# Altium PCB Maix-II.PcbDoc
Units mil, origin at the board's own origin, x right, y up, seen from the top; angles counter-clockwise.
Board outline 6000 x 4000 mil, 2 copper layers (Top Layer, Bottom Layer); 2 components, 0 nets, 72 pads, 0 vias.
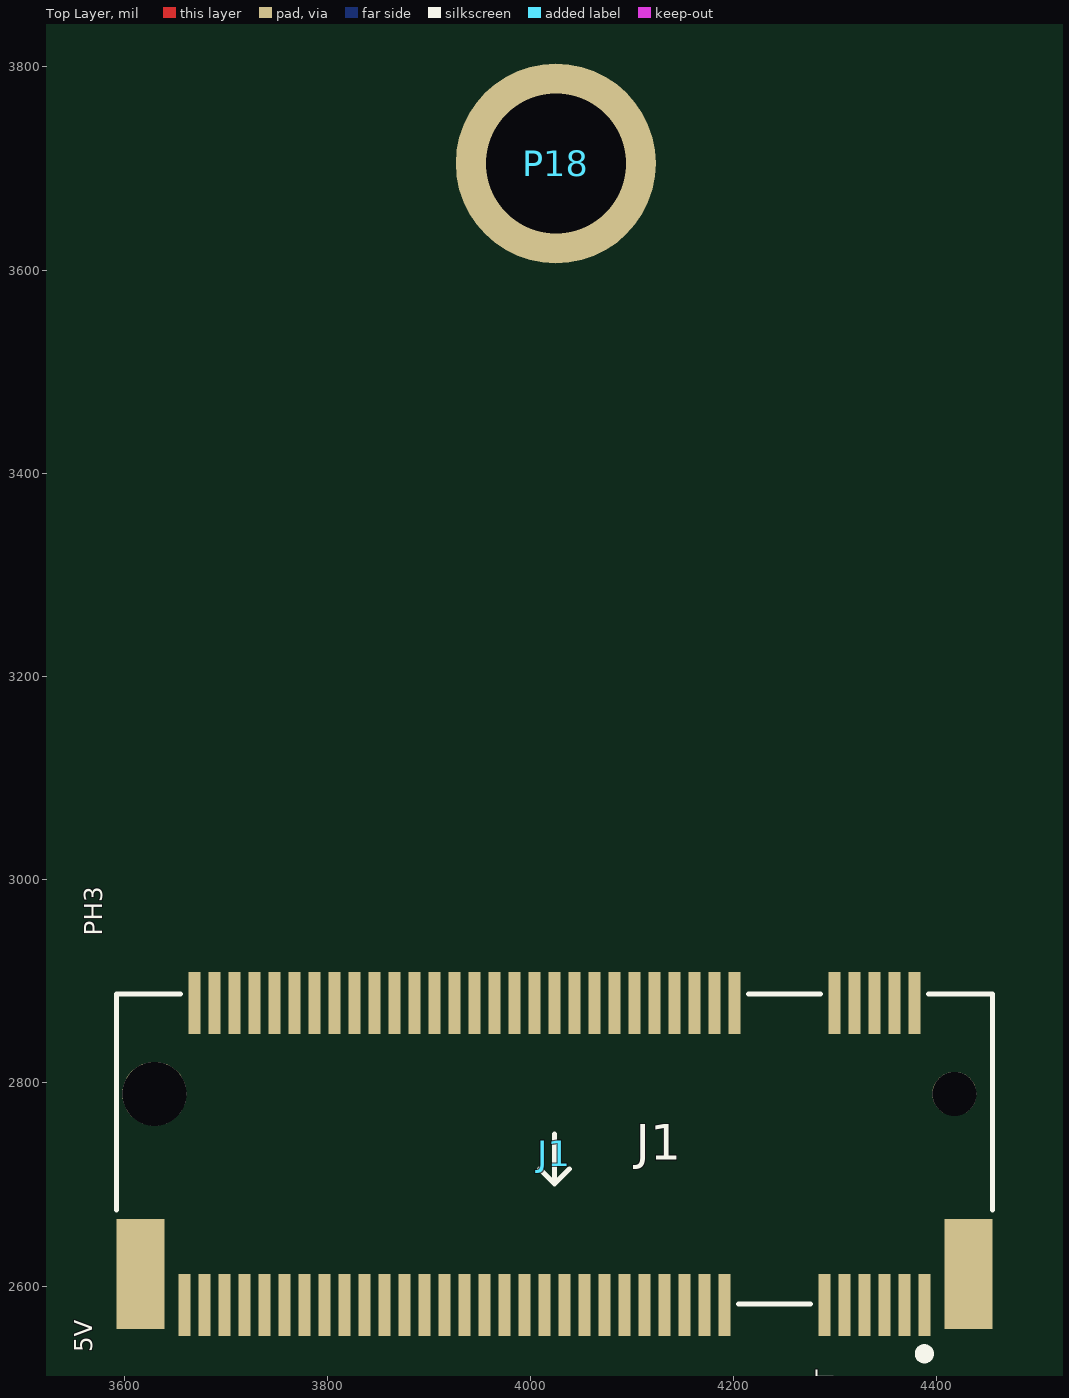
[diagram p0: Top Layer view]
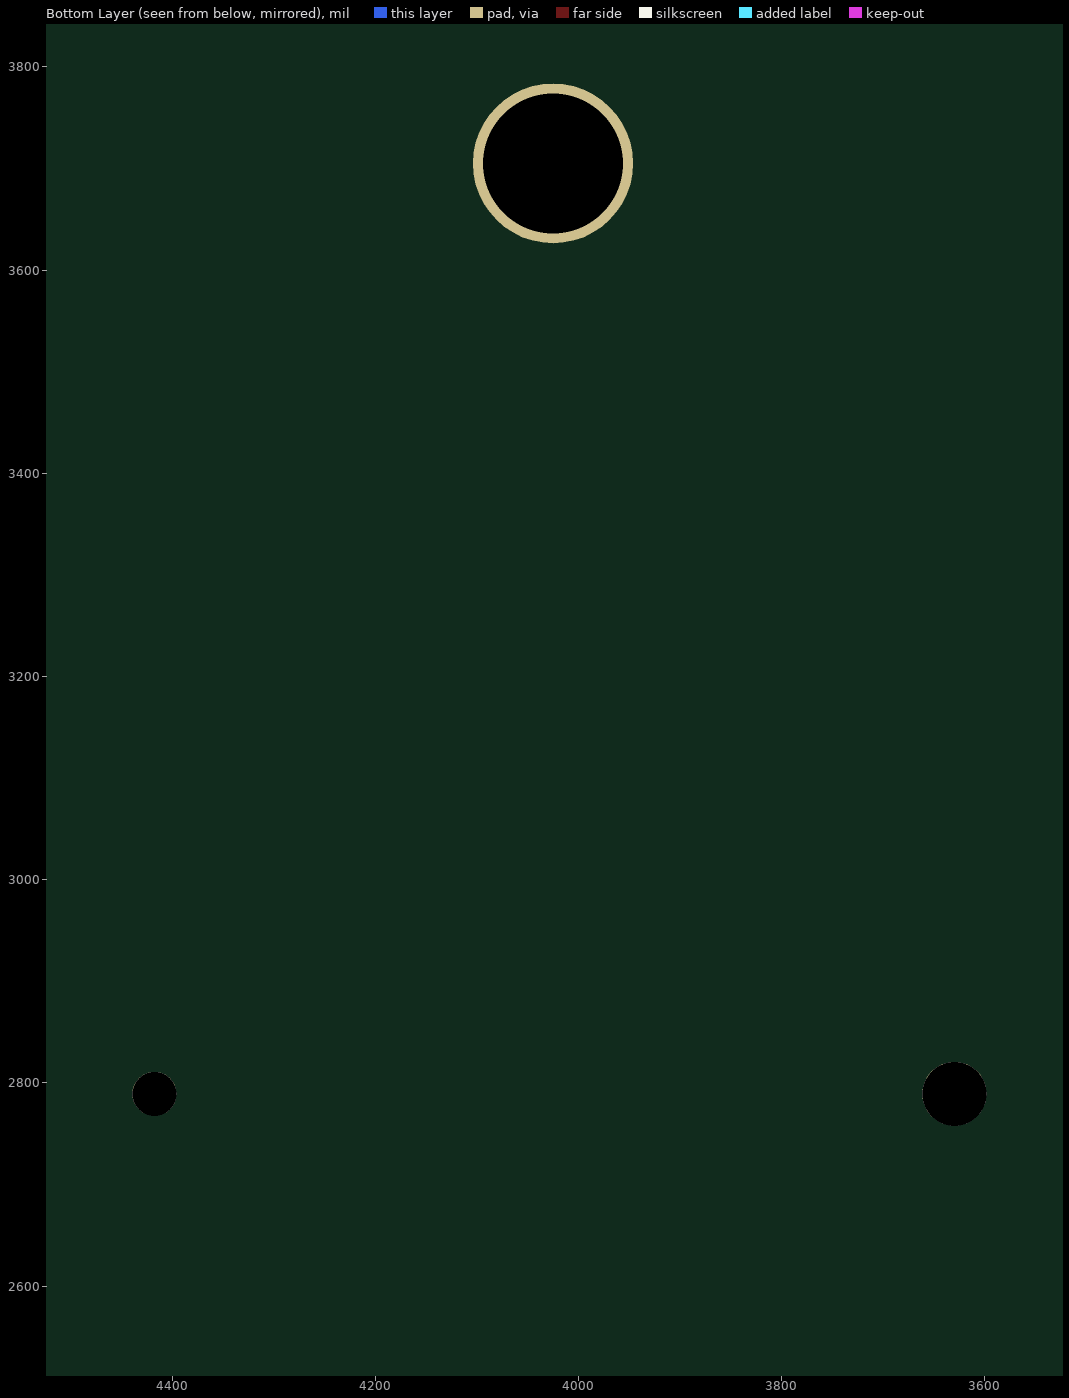
[diagram p1: Bottom Layer view, seen from below]

## Layer stack, top to bottom
Top Solder: solder mask 0.4, Solder Resist, Dk 3.5
Top Layer: signal copper 1.4
Dielectric 1: dielectric 12.6, FR-4, Dk 4.8
Bottom Layer: signal copper 1.4
Bottom Solder: solder mask 0.4, Solder Resist, Dk 3.5

## Board outline
1000,1000 7000,1000 7000,5000 1000,5000

## Design rules (kind name [scope] priority, off if disabled: settings)
Clearance [All] p1: gap=10 ignorepadtopadclearanceinfootprint=FALSE except(0: Arc-Hole Track-Hole SMDPad-Hole THPad-Hole Via-Hole Fill-Hole Poly-Hole Region-Hole Text-Hole)
PolygonConnect [All] p1: connectstyle=Relief reliefconductorwidth=10 reliefentries=4 polygonreliefangle="90 Angle" airgapwidth=10
RoutingVias [All] p1: holewidth=28 width=50 viastyle="Through Hole" minholewidth=28 minwidth=50 maxholewidth=28 maxwidth=50
SolderMaskExpansion [All] p1: expansion=4 istentingtop=FALSE
Width [All] p1: maxlimit=10 minlimit=10 preferedwidth=10
30 further rules are at their usual default settings.

## Components (designator, comment, footprint, x,y, rotation, side; value= is the part's Value field where it differs from the comment)
J1 "NGFF-67P_B-KEY座子 4.2H高" M2-67P0R50_B_FEMALE 4023.62,2789.26 r180 top
P18 "M2x4.5x4.2 铜柱2.6H 贴片螺母" "M.2 SMT-FEMALE - FULL" 4025,3705 r0 top

## Footprints (in the part's own frame and the unit in brackets; to place one, negate y for a bottom-side part, rotate by r counter-clockwise, add the part's x,y. Pads: shape width x height; smd on the part's side, far side on the other; paste and mask are expansions set on the pad)
M2-67P0R50_B_FEMALE [mm] "M2-67P0R50_B"
  rect 0.3x1.55 smd mask+0.051: 1(-9.25,5.275) 2(-9,-2.275) 3(-8.75,5.275) 4(-8.5,-2.275) 5(-8.25,5.275) 6(-8,-2.275) 7(-7.75,5.275) 8(-7.5,-2.275) 9(-7.25,5.275) 10(-7,-2.275) 11(-6.75,5.275) 20(-4.5,-2.275) 21(-4.25,5.275) 22(-4,-2.275) 23(-3.75,5.275) 24(-3.5,-2.275) 25(-3.25,5.275) 26(-3,-2.275) 27(-2.75,5.275) 28(-2.5,-2.275) 29(-2.25,5.275) 30(-2,-2.275) 31(-1.75,5.275) 32(-1.5,-2.275) 33(-1.25,5.275) 34(-1,-2.275) 35(-0.75,5.275) 36(-0.5,-2.275) 37(-0.25,5.275) 38(0,-2.275) 39(0.25,5.275) 40(0.5,-2.275) 41(0.75,5.275) 42(1,-2.275) 43(1.25,5.275) 44(1.5,-2.275) 45(1.75,5.275) 46(2,-2.275) 47(2.25,5.275) 48(2.5,-2.275) 49(2.75,5.275) 50(3,-2.275) 51(3.25,5.275) 52(3.5,-2.275) 53(3.75,5.275) 54(4,-2.275) 55(4.25,5.275) 56(4.5,-2.275) 57(4.75,5.275) 58(5,-2.275) 59(5.25,5.275) 60(5.5,-2.275) 61(5.75,5.275) 62(6,-2.275) 63(6.25,5.275) 64(6.5,-2.275) 65(6.75,5.275) 66(7,-2.275) 67(7.25,5.275) 68(7.5,-2.275) 69(7.75,5.275) 70(8,-2.275) 71(8.25,5.275) 72(8.5,-2.275) 73(8.75,5.275) 74(9,-2.275) 75(9.25,5.275)
  round 1.1 hole 1.1 mask+0.051: " "(-10,0)
  round 1.6 / inner round 1.524 / far side round 1.6 hole 1.6 mask+0.051: " "(10,0)
  rect 1.2x2.75 smd mask+0.051: SH1(-10.35,4.5) SH2(10.35,4.5)
  silkscreen extent -10.95,-2.5 10.95,6.62, body extent -10.95,-2.85 10.95,5.85, height 4.09
"M.2 SMT-FEMALE - FULL" [mm]
  round 5 / inner round 4 / far side round 4 hole 3.5 paste+0 mask+0.051: 1(0,0)
  body extent -2.26,-2.24 2.24,2.26, height 2.46

## Part data
J1: library part NGFF-67P_B-MALE
P18: library part HEADER-1X1

## Nets (pads, with @x,y where several pads share a name; then routed paths per layer and width w, separated by ;. In a path a pad name is that pad's centre, name@x,y a point inside that pad or via, vN(x,y) a via of type N, cw(c..) or ccw(c..) an arc to the next point about the centre after c; other vN are vias at no path point)
pads on no net: "J1. " J1.1 J1.2 J1.3 J1.4 J1.5 J1.6 J1.7 J1.8 J1.9 J1.10 J1.11 J1.20 J1.21 J1.22 J1.23 J1.24 J1.25 J1.26 J1.27 J1.28 J1.29 J1.30 J1.31 J1.32 J1.33 J1.34 J1.35 J1.36 J1.37 J1.38 J1.39 J1.40 J1.41 J1.42 J1.43 J1.44 J1.45 J1.46 J1.47 J1.48 J1.49 J1.50 J1.51 J1.52 J1.53 J1.54 J1.55 J1.56 J1.57 J1.58 J1.59 J1.60 J1.61 J1.62 J1.63 J1.64 J1.65 J1.66 J1.67 J1.68 J1.69 J1.70 J1.71 J1.72 J1.73 J1.74 J1.75 J1.SH1 J1.SH2 P18.1

## Silkscreen, mask and mechanical layers (free items; w line width, h text height)
Top Overlay:
  text "PH3" at 3584.67,2945 h30 r90
  text "5V" at 3574.67,2535 h30 r90
  text "AP-RESET" at 4304.67,2400 h30 r90

## Text inside footprints (layer, text, board x,y; h text height)
J1: Mechanical 9 "NGFF-67P_B" at 4062.99,2759.73 h20 r180; Mechanical 8 "38" at 3994.88,2846.82 h20 r180; Mechanical 8 "36" at 4014.57,2846.82 h20 r180; Mechanical 8 "28" at 4093.31,2846.82 h20 r180; Mechanical 8 "22" at 4152.36,2846.82 h20 r180; Mechanical 8 "20" at 4172.05,2846.82 h20 r180; Mechanical 8 "40" at 3975.2,2846.82 h20 r180; Mechanical 8 "21" at 4162.2,2549.58 h20 r180; Mechanical 8 "23" at 4142.52,2549.58 h20 r180; Mechanical 8 "25" at 4122.83,2549.58 h20 r180; Mechanical 8 "27" at 4103.15,2549.58 h20 r180; Mechanical 8 "44" at 3935.83,2846.82 h20 r180; Mechanical 8 "26" at 4112.99,2846.82 h20 r180; Mechanical 8 "24" at 4132.68,2846.82 h20 r180; Mechanical 8 "46" at 3916.14,2846.82 h20 r180; Mechanical 8 "74" at 3640.55,2846.82 h20 r180; Mechanical 8 "72" at 3660.24,2846.82 h20 r180; Mechanical 8 "34" at 4034.25,2846.82 h20 r180; Mechanical 8 "32" at 4053.94,2846.82 h20 r180; Mechanical 8 "75" at 3630.71,2549.58 h20 r180; Mechanical 8 "73" at 3650.39,2549.58 h20 r180; Mechanical 8 "4" at 4349.21,2862.82 h20 r180; Mechanical 8 "1" at 4378.74,2565.58 h20 r180; Mechanical 8 "3" at 4359.05,2565.58 h20 r180; Mechanical 8 "2" at 4368.9,2862.82 h20 r180; Mechanical 8 "69" at 3689.76,2549.58 h20 r180; Mechanical 8 "71" at 3670.08,2549.58 h20 r180; Mechanical 8 "56" at 3817.72,2846.82 h20 r180; Mechanical 8 "58" at 3798.03,2846.82 h20 r180; Mechanical 8 "70" at 3679.92,2846.82 h20 r180; Mechanical 8 "54" at 3837.4,2846.82 h20 r180; Mechanical 8 "48" at 3896.46,2846.82 h20 r180; Mechanical 8 "50" at 3876.77,2846.82 h20 r180; Mechanical 8 "62" at 3758.66,2846.82 h20 r180; Mechanical 8 "60" at 3778.35,2846.82 h20 r180; Mechanical 8 "66" at 3719.29,2846.82 h20 r180; Mechanical 8 "64" at 3738.98,2846.82 h20 r180; Mechanical 8 "52" at 3857.09,2846.82 h20 r180; Mechanical 8 "68" at 3699.61,2846.82 h20 r180; Mechanical 8 "53" at 3847.24,2549.58 h20 r180; Mechanical 8 "55" at 3827.56,2549.58 h20 r180; Mechanical 8 "59" at 3788.19,2549.58 h20 r180; Mechanical 8 "57" at 3807.87,2549.58 h20 r180; Mechanical 8 "63" at 3748.82,2549.58 h20 r180; Mechanical 8 "61" at 3768.5,2549.58 h20 r180; Mechanical 8 "65" at 3729.13,2549.58 h20 r180; Mechanical 8 "67" at 3709.45,2549.58 h20 r180; Mechanical 8 "41" at 3965.35,2549.58 h20 r180; Mechanical 8 "43" at 3945.67,2549.58 h20 r180; Mechanical 8 "45" at 3925.98,2549.58 h20 r180; Mechanical 8 "47" at 3906.3,2549.58 h20 r180; Mechanical 8 "29" at 4083.46,2549.58 h20 r180; Mechanical 8 "42" at 3955.51,2846.82 h20 r180; Mechanical 8 "35" at 4024.41,2549.58 h20 r180; Mechanical 8 "33" at 4044.09,2549.58 h20 r180; Mechanical 8 "49" at 3886.61,2549.58 h20 r180; Mechanical 8 "SH2" at 3587.4,2564.09 h20 r180; Mechanical 8 "5" at 4339.37,2565.58 h20 r180; Mechanical 8 "7" at 4319.68,2565.58 h20 r180; Mechanical 8 "8" at 4309.84,2862.82 h20 r180; Mechanical 8 "6" at 4329.53,2862.82 h20 r180; Mechanical 8 "SH1" at 4402.36,2564.09 h20 r180; Mechanical 8 "10" at 4290.16,2846.82 h20 r180; Mechanical 8 "30" at 4073.62,2846.82 h20 r180; Mechanical 8 "37" at 4004.72,2549.58 h20 r180; Mechanical 8 "39" at 3985.04,2549.58 h20 r180; Mechanical 8 "51" at 3866.93,2549.58 h20 r180; Mechanical 8 "31" at 4063.78,2549.58 h20 r180; Mechanical 8 "9" at 4300,2565.58 h20 r180; Mechanical 8 "11" at 4280.31,2549.58 h20 r180